# Altium PCB OpenHEG.PcbDoc
Units mm, origin at the board's own origin, x right, y up, seen from the top; angles counter-clockwise.
Board outline 56.57 x 15.77 mm, 2 copper layers (Top Layer, Bottom Layer); 20 components, 18 nets, 70 pads, 13 vias.
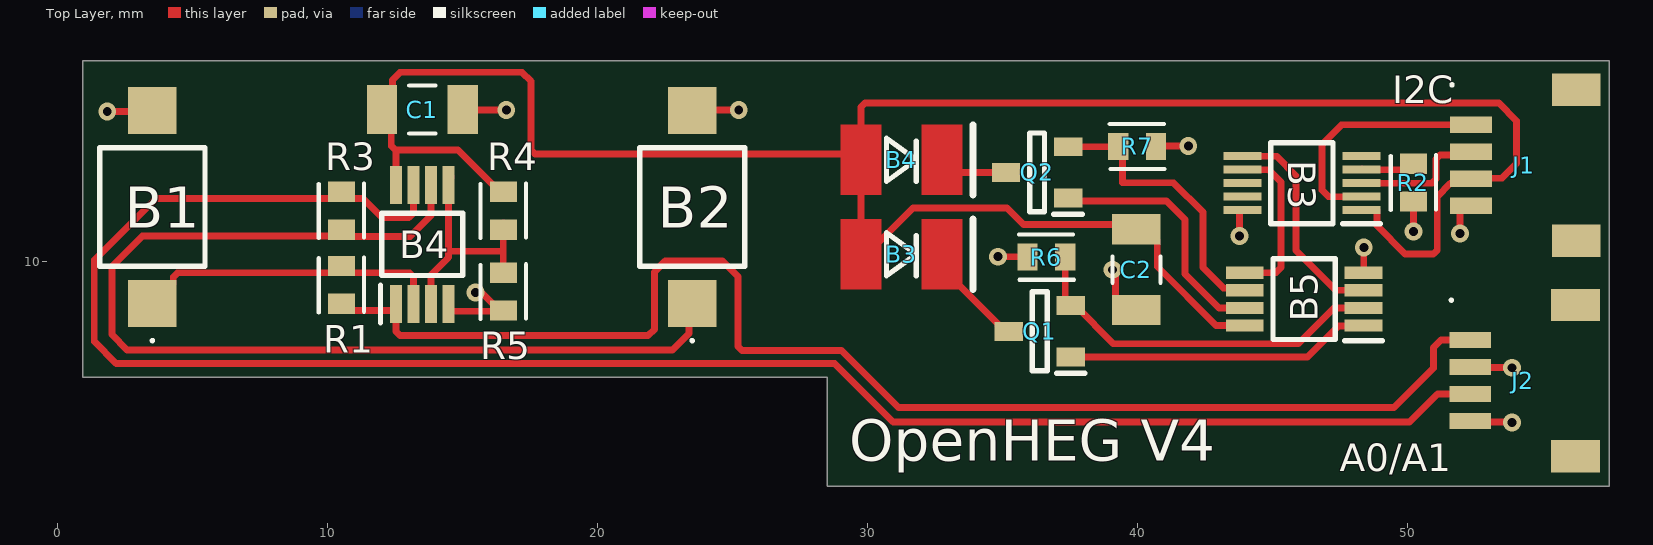
[diagram p0: Top Layer view]
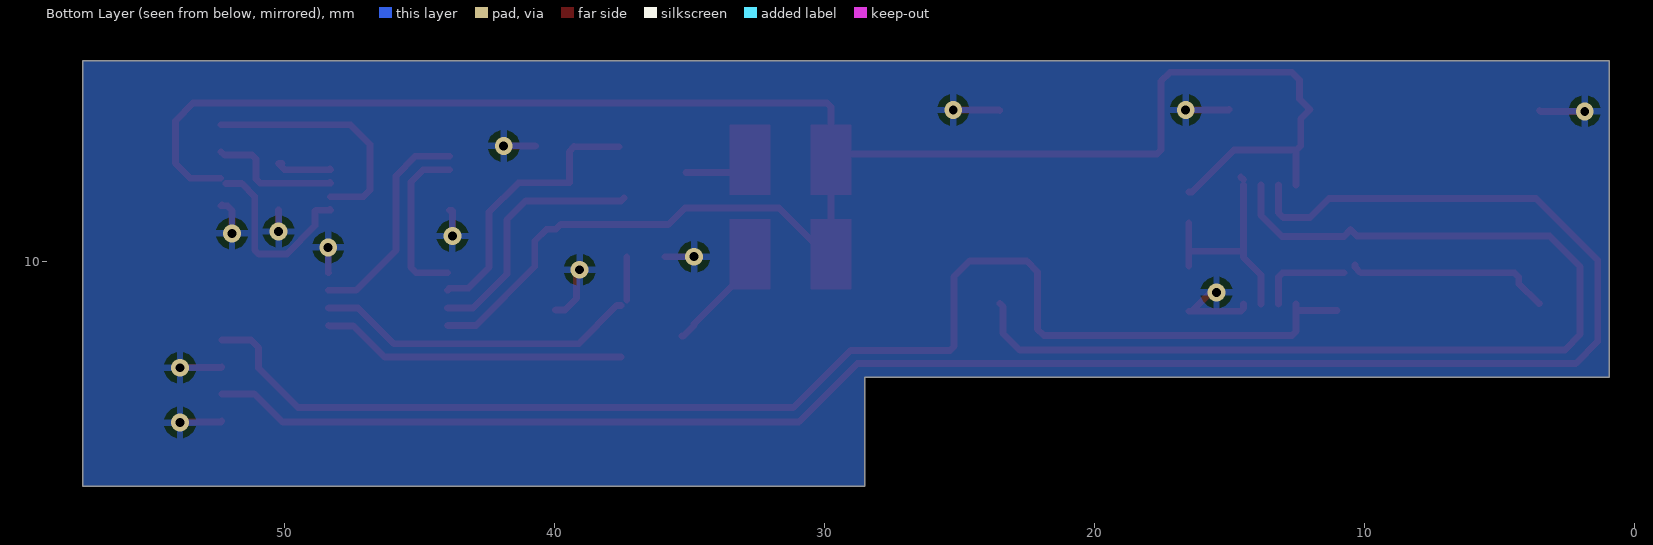
[diagram p1: Bottom Layer view, seen from below]
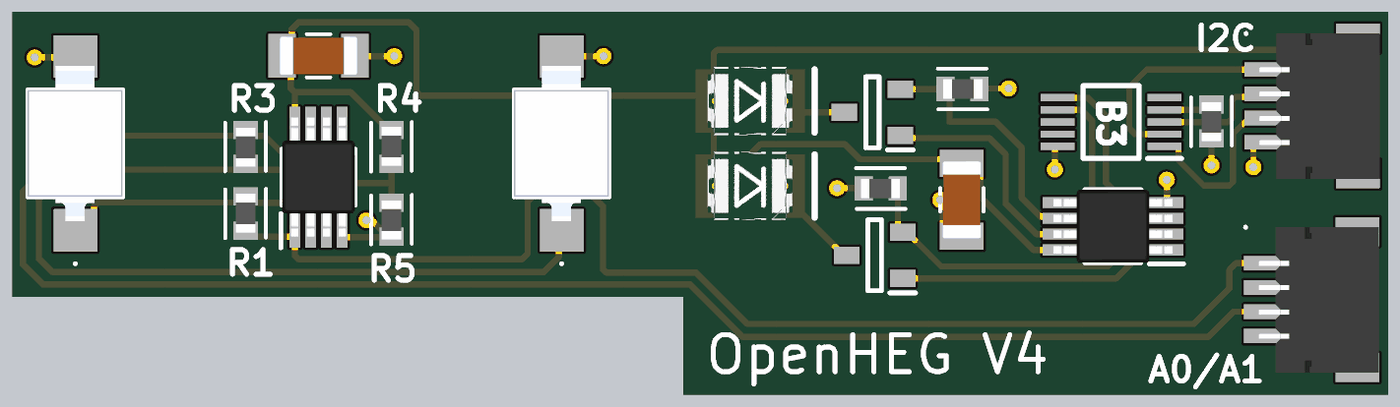
[diagram p2: 3D render of the assembled board from above, using the file's embedded part models]

## Layer stack, top to bottom
Top Solder: solder mask 0.0102, Solder Resist, Dk 3.5
Top Layer: signal copper 0.0356
Dielectric 1: dielectric 0.32, FR-4, Dk 4.8
Bottom Layer: signal copper 0.0356
Bottom Solder: solder mask 0.0102, Solder Resist, Dk 3.5

## Board outline
0.914,5.69 0.914,17.424 57.48,17.424 57.48,1.651 28.5,1.651 28.5,5.69

## Design rules (kind name [scope] priority, off if disabled: settings)
Clearance [All] p1: gap=0.152 ignorepadtopadclearanceinfootprint=TRUE
MinimumSolderMaskSliver [All] p1: minsoldermaskwidth=0.152
PolygonConnect [All] p1: connectstyle=Relief reliefconductorwidth=0.254 reliefentries=4 polygonreliefangle="90 Angle" airgapwidth=0.254
RoutingVias [All] p1: holewidth=0.33 width=0.66 viastyle="Through Hole" minholewidth=0.33 minwidth=0.66 maxholewidth=0.33 maxwidth=0.66
SilkToSilkClearance [All] p1: silktosilkclearance=0.152
SilkToSolderMaskClearance [IsPad] p1: minsilkscreentomaskgap=0.152 clearancetoexposedcopper=TRUE
SolderMaskExpansion [All] p1: expansion=0.102 istentingtop=FALSE
SupplyNets "Schematic Supply Nets_1" [InNet('GND')] p1: voltage=0.000
SupplyNets "Schematic Supply Nets" [InNet('3V3')] p2: voltage=0.000
Width [All] p1: maxlimit=0.508 minlimit=0.152 preferedwidth=0.152
27 further rules are at their usual default settings.

## Classes and differential pairs
component class OpenHEG: B1 B2 B3 B4 B5 C1 C2 J2 Q1 Q2 R1 R2 R3 R4 R5 R6 R7

## Components (designator, comment, footprint, x,y, rotation, side; value= is the part's Value field where it differs from the comment)
B1 "VBPW34S" VBPW34S 3.5,12 r90 top locked
B2 "VBPW34S" VBPW34S 23.5,12 r90 top locked
B3 "MCP4728T-E_UN" SOP50P490X110-10N 46.091,12.883 r180 top
B3 "850D" PCBComponent_1 29,8.95 r0 top locked
B4 "TLV272CDGKG4" SOP65P490X110-8N 13.5,10.612 r90 top
B4 "700" PCBComponent_1 29,12.45 r0 top locked
B5 "TLV272CDGKG4" SOP65P490X110-8N 46.167,8.59 r180 top
C1 "22uF" 1206_Passive_Capacitor 13.5,15.612 r0 top
C2 "22uF" 1206_Passive_Capacitor 39.954,9.677 r90 top
J1 "4208" 4390 54.762,13.538 r90 top
J2 "4208" 4390 54.737,5.563 r90 top
Q1 "MMBT3904" SOT95P240X120-3N 36.372,7.395 r180 top
Q2 "MMBT3904" SOT95P240X120-3N 36.276,13.284 r180 top
R1 "47k Ohm" 0603_PASSIVE_Resistor 10.5,9.112 r270 top value=47kOhm
R2 "4.7k Ohm" 0603_PASSIVE_Resistor 50.22,12.906 r90 top
R3 "47k Ohm" 0603_PASSIVE_Resistor 10.5,11.862 r90 top value=47kOhm
R4 "47kOhm" 0603_PASSIVE_Resistor 16.5,11.862 r270 top value="47k Ohm"
R5 "4.7k Ohm" 0603_PASSIVE_Resistor 16.5,8.862 r90 top
R6 "0.5 Ohm" 0603_PASSIVE_Resistor 36.622,10.145 r0 top
R7 "0.5 Ohm" 0603_PASSIVE_Resistor 39.983,14.243 r180 top

## Footprints (in the part's own frame and the unit in brackets; to place one, negate y for a bottom-side part, rotate by r counter-clockwise, add the part's x,y. Pads: shape width x height; smd on the part's side, far side on the other; paste and mask are expansions set on the pad)
0603_PASSIVE_Resistor [mm] "Reference: http://livepartlibrary.com/fpdimensions.html"
  rect 0.75x1 smd mask+0: 1(-0.7,0) 2(0.7,0)
  silkscreen extent -1.02,-0.84 1.02,0.84, body extent -0.81,-0.4 0.79,0.4, height 0.55
1206_Passive_Capacitor [mil]
  rect 44x71 smd: 1(-59,0) 2(59,0)
  silkscreen extent -19,-35 19,35, body extent -63,-31 63,32, height 50
4390 [mil]
  rect 23.62x61.02 smd: 1(-58.75,95) 2(-19.38,95) 3(20,95) 4(59.37,95)
  rect 47.24x70.87 smd: MT1(-109.93,-58.55) MT2(110.55,-58.55)
  silkscreen extent 116,121 120,125, body extent -118,-93 118,102, height 128
PCBComponent_1 [mm]
  round 0.025 smd: 1(0.75,1.3) 2(3.75,1.3)
  Top Layer region: 0,0 0,2.6 1.5,2.6 1.5,0
  Top Layer region: 3,0 3,2.6 4.5,2.6 4.5,0
  silkscreen extent 1.7,0 4.9,2.6, body extent 0.5,-0.1 4,2.7, height 1.65
SOP50P490X110-10N [mm]
  rect 1.4x0.3 smd: 1(-2.2,1) 2(-2.2,0.5) 3(-2.2,0) 4(-2.2,-0.5) 5(-2.2,-1) 6(2.2,-1) 7(2.2,-0.5) 8(2.2,0) 9(2.2,0.5) 10(2.2,1)
  silkscreen extent -2.9,-1.5 1.15,1.5
SOP65P490X110-8N [mm]
  rect 1.4x0.45 smd: 1(-2.2,0.975) 2(-2.2,0.325) 3(-2.2,-0.325) 4(-2.2,-0.975) 5(2.2,-0.975) 6(2.2,-0.325) 7(2.2,0.325) 8(2.2,0.975)
  silkscreen extent -2.9,-1.5 1.15,1.55, body extent -2.45,-1.5 2.45,1.5, height 1.1
SOT95P240X120-3N [mm]
  rect 1.05x0.7 smd: 1(-1.15,0.95) 2(-1.15,-0.95) 3(1.15,0)
  silkscreen extent -1.68,-1.46 0.28,1.55
VBPW34S [mm]
  rect 1.75x1.8 smd: 1(-3.575,0) 2(3.575,0)
  silkscreen extent -5,-1.95 2.2,1.95, body extent -3.2,-1.94 3.2,1.96, height 1.3

## Part data
B1 B2: library part CMP-006-000002-2, "Photodiode PIN Chip 940nm 2-Pin SMD T/R", Manufacturer_Name=Vishay, Mouser Part Number=782-VBPW34S, Arrow Part Number=VBPW34S, Arrow Price/Stock=https://www.arrow.com/en/products/vbpw34s/vishay?utm_currency=USD&region=nac, Datasheet Link=https://componentsearchengine.com/Datasheets/2/VBPW34S.pdf, Design Item ID=VBPW34S, Geometry.Height=1.4mm, Manufacturer_Part_Number=VBPW34S, Mouser Price/Stock=https://www.mouser.co.uk/ProductDetail/Vishay-Semiconductors/VBPW34S?qs=Uj7aA%252BCqp8ZDwjFKEZ8K8A%3D%3D, Source=VBPW34S.SchLib
B3: library part CMP-009-000002-1, "Digital to Analog Converters - DAC Quad 12-bit NV DAC with I2C interface", Arrow Part Number=MCP4728T-E/UN, Manufacturer_Name=Microchip, Mouser Part Number=579-MCP4728T-E/UN, Arrow Price/Stock=https://www.arrow.com/en/products/mcp4728t-eun/microchip-technology?utm_currency=USD&region=nac, Datasheet Link=https://componentsearchengine.com/Datasheets/2/MCP4728T-E_UN.pdf, Design Item ID=MCP4728T-E_UN, Geometry.Height=1.1mm, Manufacturer_Part_Number=MCP4728T-E/UN, Mouser Price/Stock=https://www.mouser.co.uk/ProductDetail/Microchip-Technology/MCP4728T-E-UN?qs=E6wAi2XWqcPJxULNRq0fKQ%3D%3D, Source=MCP4728T-E_UN.SchLib
B3 B4: library part CMP-022-000000-1, Design Item ID=805D, Source=SMT850.SchLib
B4 B5: library part CMP-003-000001-2, "Operational Amplifiers - Op Amps 550-uA/Ch 3-MHz Rail-to-Rail Out", Manufacturer_Name="Texas Instruments", Mouser Part Number=595-TLV272CDGKG4, Datasheet Link=https://www.ti.com/lit/ds/symlink/tlv272.pdf?ts=1621864530946&ref_url=https%253A%252F%252Fwww.ti.com%252Fproduct%252FTLV272, Design Item ID=TLV272CDGKG4, Geometry.Height=1.1mm, Manufacturer_Part_Number=TLV272CDGKG4, Mouser Price/Stock=https://www.mouser.com/Search/Refine.aspx?Keyword=595-TLV272CDGKG4, Source=TLV272CDGKG4.SchLib
C1 C2: library part C_22uF_1206, "22uF ±10% 25V X5R 1206 Multilayer Ceramic Capacitors MLCC - SMD/SMT RoHS", LCSC Part#=C12891, MFR Part #=CL31A226KAHNNNE, Datasheet=https://datasheet.lcsc.com/lcsc/1811031514_Samsung-Electro-Mechanics-CL31A226KAHNNNE_C12891.pdf, Type=basic
J1 J2: library part CMP-005-000000-1, "Adafruit Accessories JST SH 4-pin Right Angle Connector (10-pack) - Qwiic Compatible", Manufacturer_Name=Adafruit, Component Type=Connectors, Datasheet Link=https://cdn-shop.adafruit.com/product-files/4390/4390_C13925-001_CCP-W20-04-BK-SMT-R-A.PDF, Design Item ID=4208, Height=7.05mm, Manufacturer_Part_Number=4208, Pin Count=6, Source=SamacSys.SchLib
Q1 Q2: library part CMP-017-000000-1, "SOT-23-3", Manufacturer_Name=onsemi, Mouser Part Number=512-MMBT3904, Arrow Part Number=MMBT3904, Arrow Price/Stock=https://www.arrow.com/en/products/mmbt3904/on-semiconductor, Datasheet Link=https://www.onsemi.com/download/data-sheet/pdf/PZT3904-D.pdf, Design Item ID=MMBT3904, Geometry.Height=1.2mm, Manufacturer_Part_Number=MMBT3904, Mouser Price/Stock=https://www.mouser.co.uk/ProductDetail/onsemi-Fairchild/MMBT3904?qs=UMEuL5FsraCg3xKjS4uBJQ%3D%3D, Source=MMBT3904.SchLib
R1 R3 R4: library part R_2Ohm_0603, "CHIP RESISTOR - SURFACE MOUNT 47kOHMS ±1% 1/10W 0603 ROHS", LCSC Part#=C22977, MFR Part #=0603WAF200KT5E, Datasheet=https://datasheet.lcsc.com/szlcsc/Uniroyal-Elec-0603WAF200KT5E_C22977.pdf, Type=Basic
R2 R5: library part R_2Ohm_0603, "CHIP RESISTOR - SURFACE MOUNT 4.7kOHMS ±1% 1/10W 0603 ROHS", LCSC Part#=C22977, MFR Part #=0603WAF200KT5E, Datasheet=https://datasheet.lcsc.com/szlcsc/Uniroyal-Elec-0603WAF200KT5E_C22977.pdf, Type=Basic
R6 R7: library part R_2Ohm_0603, "CHIP RESISTOR - SURFACE MOUNT 0.5OHMS ±1% 1/10W 0603 ROHS", LCSC Part#=C22977, MFR Part #=0603WAF200KT5E, Datasheet=https://datasheet.lcsc.com/szlcsc/Uniroyal-Elec-0603WAF200KT5E_C22977.pdf, Type=Basic

## Via types
v1: diameter 0.66, hole 0.33, Top Layer to Bottom Layer, 13 vias

## Nets (pads, with @x,y where several pads share a name; then routed paths per layer and width w, separated by ;. In a path a pad name is that pad's centre, name@x,y a point inside that pad or via, vN(x,y) a via of type N, cw(c..) or ccw(c..) an arc to the next point about the centre after c; other vN are vias at no path point)
3V3: B3.1 B4.1@29.75,13.75 B4.8 B5.8 C1.1 C2.2 J1.2 R4.1 | length 87.3
  Top Layer w0.254: B4.8 12.525,14.087 12.5,14.112 ; R4.1 16.375,12.562 14.825,14.112 12.5,14.112 ; B5.8 42.905,7.615 40.729,9.792 40.729,10.744 40.297,11.176 C2.2 39.776,11.354 35.774,11.354 35.165,11.963 31.674,11.963 30.011,10.301 29.808,10.301 29.808,10.25 29.75,10.25 B4.1@29.75,13.75 ; B3.1@48.314,11.906 48.291,11.883 48.841,11.883 48.864,11.86 48.864,11.308 49.911,10.262 50.956,10.262 51.105,10.41 51.105,12.395 51.583,12.873 J1.2@52.176,12.873 ; J1.2@52.372,13.069 53.505,13.069 54.045,13.608 54.045,15.196 53.391,15.85 29.899,15.85 29.75,15.701 B4.1@29.75,13.75 ; 12.5,14.112 12.351,14.261 12.351,15.263 C1.1 12.394,16.005 12.394,16.712 12.675,16.993 17.196,16.993 17.526,16.662 17.526,14.119 17.675,13.97 29.53,13.97 B4.1@29.75,13.75
700_B: B5.7 Q2.1 | length 9.4
  Top Layer w0.254: Q2.1 37.538,12.222 41.072,12.222 41.758,11.536 41.758,9.525 43.017,8.265 B5.7
700_C: B4.2@32.75,13.75 Q2.3 | length 2.6
  Top Layer w0.254: B4.2@32.75,13.75 33.216,13.284 Q2.3
700_E: B5.6 Q2.2 R7.2 | length 10.5
  Top Layer w0.254: Q2.2@37.601,14.234 R7.2@39.275,14.234 ; R7.2 R7.2@39.275,14.234 ; B5.6 43.891,8.992 43.18,8.992 42.418,9.754 42.418,11.811 41.331,12.898 39.446,12.898 39.446,14.063 R7.2@39.275,14.234
850_B: B5.1 Q1.1 | length 11.3
  Top Layer w0.254: Q1.1 46.298,6.445 47.44,7.587 48.339,7.587 B5.1
850_C: B3.2@32.75,10.25 Q1.3 | length 4.1
  Top Layer w0.254: B3.2@32.75,10.25 32.75,9.744 34.824,7.67 34.824,7.618 35.217,7.225 Q1.3@35.269,7.225
850_E: B5.2 Q1.2 R6.2 | length 13.6
  Top Layer w0.254: Q1.2@37.322,8.545 R6.2 ; Q1.2 37.697,8.345 39.108,6.934 45.949,6.934 47.28,8.265 B5.2
A0: B4.1@12.525,8.412 J2.4 R1.2 | length 50
  Top Layer w0.254: 11,8.162 B4.1@12.427,8.162 ; B4.1@12.525,8.412 12.525,7.383 12.674,7.234 21.864,7.234 22.098,7.468 22.098,9.598 22.5,10 24.62,10 25.197,9.423 25.197,6.829 25.346,6.68 29.032,6.68 31.14,4.572 49.505,4.572 50.962,6.029 50.962,6.791 51.241,7.071 J2.4
A1: B4.7 J2.2 R3.2 | length 69.8
  Top Layer w0.254: R3.2@10.478,12.319 3.632,12.319 1.346,10.033 1.346,7.01 2.159,6.198 28.778,6.198 30.947,4.029 50.079,4.029 51.121,5.07 J2.2 ; R3.2@10.5,12.312 11.3,12.312 12,11.612 13,11.612 13.175,11.787 B4.7
CH_A: B3.6 B5.3 | length 8.2
  Top Layer w0.254: B3.6 45.147,13.883 45.872,13.157 45.872,10.389 47.346,8.915 B5.3
CH_B: B3.7 B5.5 | length 6.2
  Top Layer w0.254: B3.7 44.859,13.383 45.314,12.929 45.314,9.754 45.125,9.565 B5.5
GND: B1.2 B2.2 B3.10 B4.4 B5.4 C1.2 C2.1 J1.1 J2.1 J2.3 R2.1 R5.1 R6.1 R7.1 | length 20.1
  Top Layer w0.254: v1(1.829,15.545) 3.47,15.545 B1.2 ; B4.4 14.475,8.235 14.573,8.137 R5.1@16.5,8.137 ; C1.2 15.015,15.596 v1(16.612,15.596) ; v1(15.47,8.838) 15.7,8.838 R5.1@16.4,8.137 ; B2.2 23.521,15.596 v1(25.222,15.596) ; v1(34.823,10.16) R6.1@35.908,10.16 ; v1(39.065,9.677) 39.065,9.567 39.179,9.453 39.179,8.611 39.611,8.179 C2.1 ; R7.1@40.706,14.265 v1(41.88,14.265) ; v1(43.78,10.927) 43.78,11.86 43.803,11.883 B3.10 ; B5.4 48.382,9.58 v1(48.382,10.505) ; v1(50.22,11.096) R2.1@50.22,11.901 ; v1(51.943,11.024) 51.943,11.873 52.116,12.046 J1.1 J1.1@52.314,12.081 ; J2.1 52.353,4.042 53.845,4.042 v1(53.873,4.013) ; J2.3 52.337,6.058 53.861,6.058 v1(53.873,6.045)
NetB1_1: B1.1 B4.2@13.175,8.412 R1.1 | length 11.1
  Top Layer w0.254: B1.1 3.525,8.425 4.273,9.173 4.273,9.416 4.422,9.564 10.127,9.564 10.341,9.778 R1.1@10.341,9.858 ; R1.1@10.75,9.562 13.026,9.562 13.175,9.414 B4.2@13.175,8.412
NetB2_1: B2.1 B4.6 R3.1 | length 39.5
  Top Layer w0.254: B4.6 13.825,11.687 13.052,10.914 10.748,10.914 R3.1 10.26,10.922 3.124,10.922 2,9.798 2,7.271 2.565,6.706 22.771,6.706 23.383,7.318 23.383,8.308 B2.1
NetB3_4: B3.4 R2.2 | length 2.2
  Top Layer w0.254: B3.4@48.314,13.406 B3.4 49.997,13.383 R2.2 R2.2@50.095,13.606
SCL: B3.2@48.291,12.383 J1.4 | length 9.5
  Top Layer w0.254: B3.2@48.291,12.383 47.078,12.383 46.838,12.624 46.838,14.326 47.558,15.046 J1.4 J1.4@51.874,15.046
SDA: B3.3 J1.3 | length 5
  Top Layer w0.254: B3.3@48.314,12.906 B3.3 50.909,12.883 51.058,13.032 51.058,13.773 51.207,13.922 52.225,13.922 J1.3
VDIV: B4.3 B4.5 R4.2 R5.2 | length 8.4
  Top Layer w0.254: B4.3 13.825,9.487 14.475,10.137 14.475,10.362 ; B4.5 14.475,10.362 ; B4.5@14.475,13.014 B4.5@14.573,13.112 ; R5.2@16.5,9.812 16.5,10.362 ; R4.2@16.5,11.412 16.5,10.362 ; 14.475,10.362 16.5,10.362
pads on no net: B3.5 B3.8 B3.9 J1.MT1 J1.MT2 J2.MT1 J2.MT2

## Polygon pours and split planes (outlines as drawn)
GND on Bottom Layer "GND" (solid, pour order 0): 0.914,17.424 57.48,17.424 57.48,1.651 28.5,1.651 28.5,5.69 0.914,5.69

## Silkscreen, mask and mechanical layers (free items; w line width, h text height)
Top Overlay:
  text "I2C" at 49.428,15.85 h1.02
  text "OpenHEG V4" at 29.312,2.591 h1.52
  text "A0/A1" at 47.498,2.21 h1.02
Stiffener:
  rectangle: 28.5,1.626 57.531,17.45
  rectangle: 9.093,5.639 17.932,17.475
  rectangle: 21.184,5.664 25.832,17.475
  rectangle: 0.889,5.639 5.588,17.45